# Altium PCB M66.PcbDoc
Units mm, origin at the board's own origin, x right, y up, seen from the top; angles counter-clockwise.
Board outline 25.78 x 41.4 mm, 2 copper layers (Top Layer, Bottom Layer); 26 components, 32 nets, 134 pads, 32 vias.
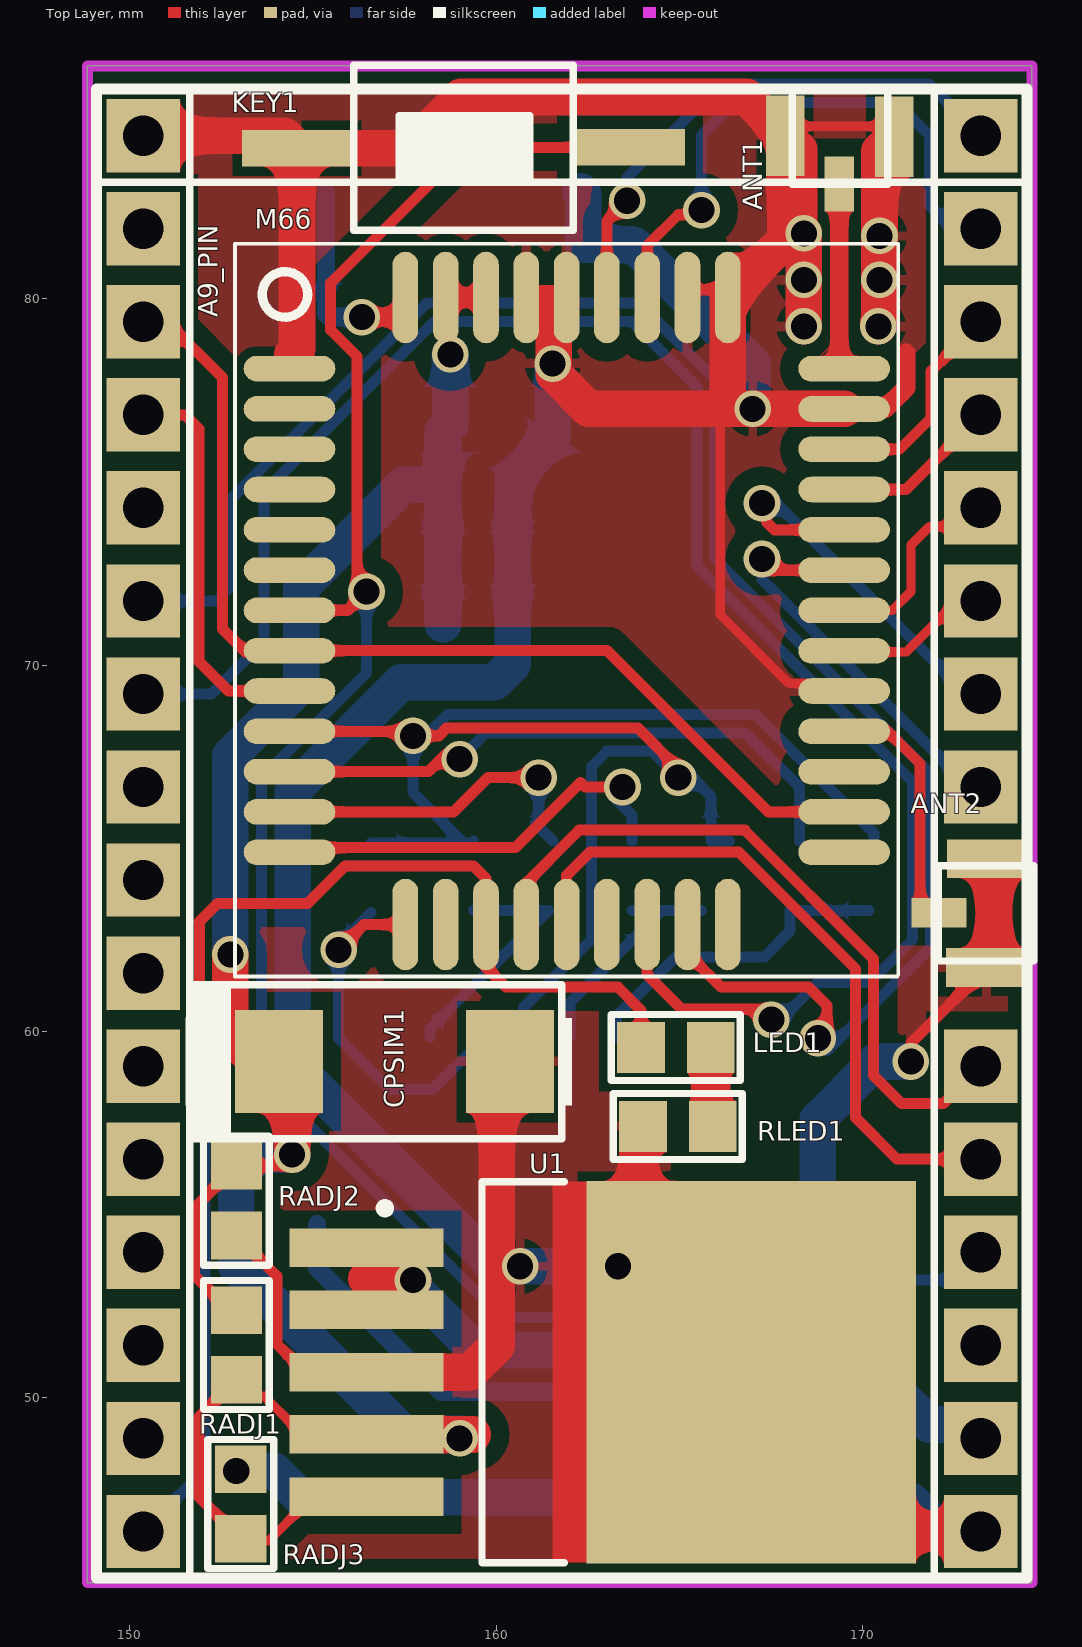
[diagram p0: Top Layer view]
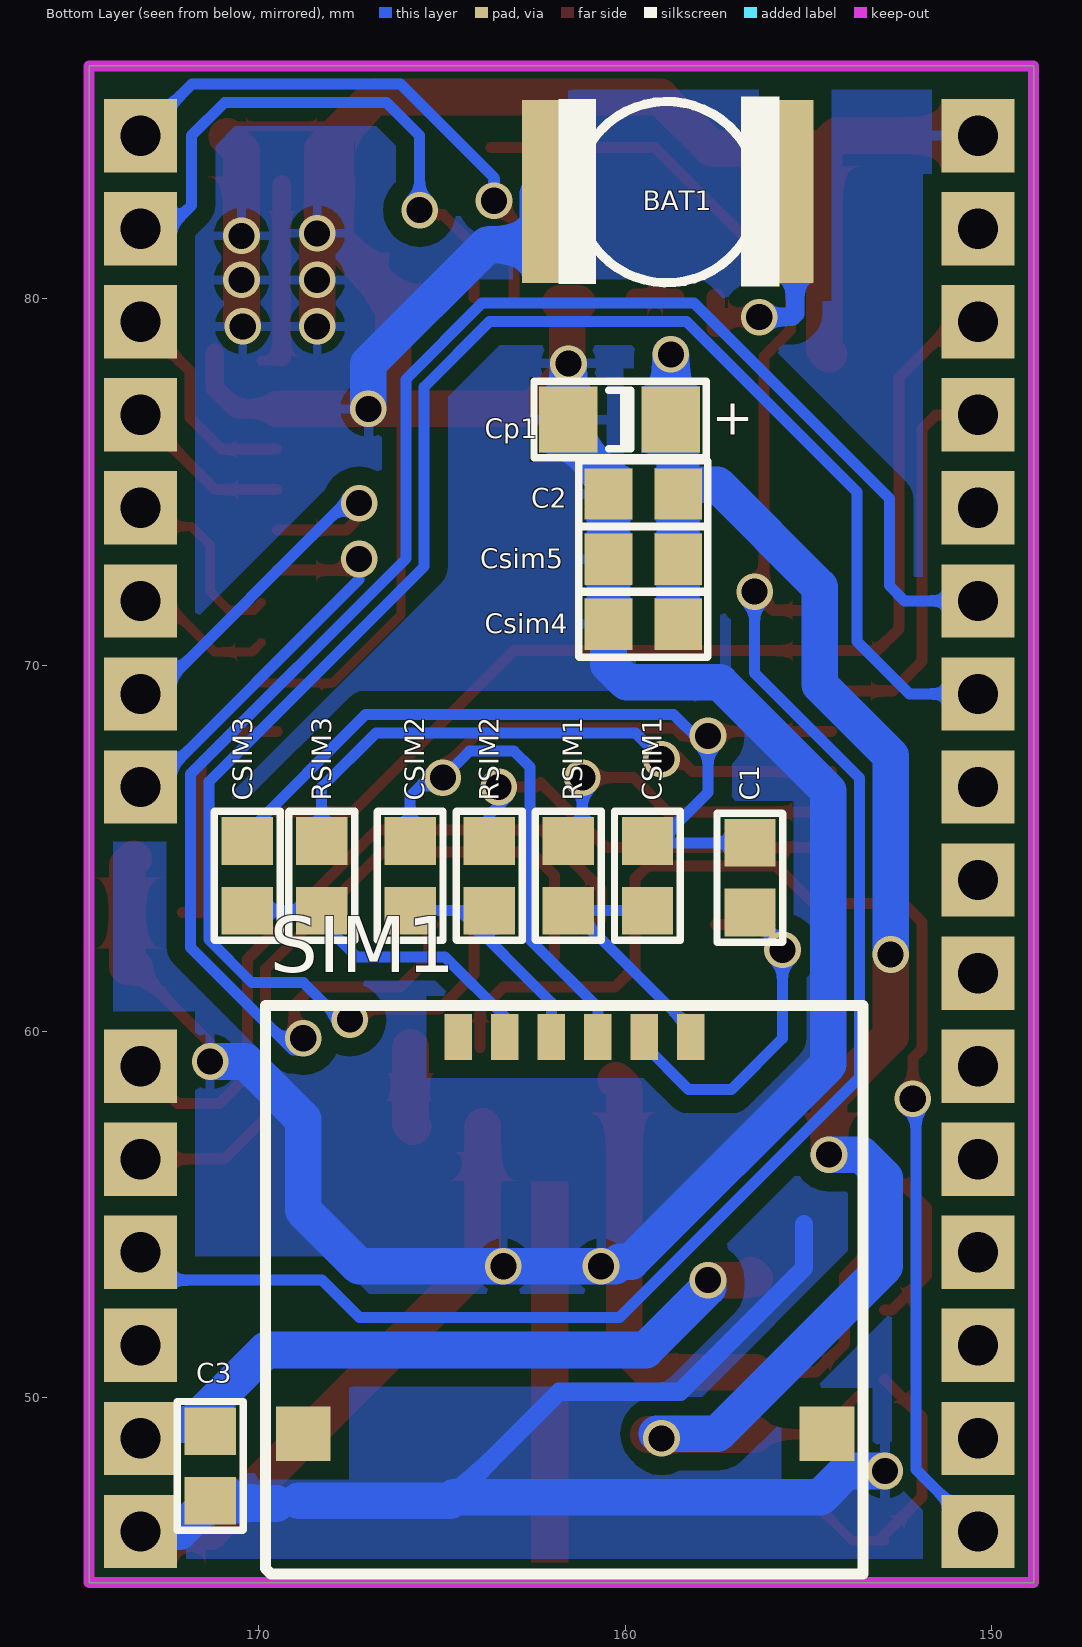
[diagram p1: Bottom Layer view, seen from below]

## Layer stack, top to bottom
Top Solder: solder mask 0.0102, Solder Resist, Dk 3.5
Top Layer: signal copper 0.0356
Dielectric 1: dielectric 0.32, FR-4, Dk 4.8
Bottom Layer: signal copper 0.0356
Bottom Solder: solder mask 0.0102, Solder Resist, Dk 3.5

## Board outline
148.844,44.958 148.844,86.36 174.625,86.36 174.625,44.958

## Design rules (kind name [scope] priority, off if disabled: settings)
Clearance [All] p1: gap=0.2 ignorepadtopadclearanceinfootprint=FALSE except(0.5: Arc-Poly Track-Poly SMDPad-Poly THPad-Poly Via-Poly Fill-Poly Poly-Poly)
ComponentClearance [All] p1: gap=0.01 collisioncheckmode=3 verticalgap=0.01 showdistances=FALSE
PolygonConnect [All] p1: connectstyle=Relief reliefconductorwidth=0.254 reliefentries=4 polygonreliefangle="90 Angle" airgapwidth=0.254
RoutingVias [All] p1: holewidth=0.711 width=1.27 viastyle="Through Hole" minholewidth=0.711 minwidth=1.27 maxholewidth=0.711 maxwidth=1.27
SolderMaskExpansion [All] p1: expansion=0.102
Width [All] p1: maxlimit=10 minlimit=0.254 preferedwidth=0.254 minimp=50.000000 maximp=50.000000 favimp=50.000000
29 further rules are at their usual default settings.

## Components (designator, comment, footprint, x,y, rotation, side; value= is the part's Value field where it differs from the comment)
A9_PIN "A9_module" A9_MODULE 150.368,69.19 r0 top locked
ANT1 "ANT_UFL" UFL_CON 169.291,84.582 r180 top
ANT2 "ANT_UFL" UFL_CON 173.533,63.322 r90 top
BAT1 "CAP_BATTERY" CAP_BAT 155.356,82.931 r270 bottom
C1 "100nf,50v" 0805. 156.595,64.19 r90 bottom
C2 "100nf,50v" 0805. 159.512,74.676 r180 bottom
C3 "100nf,50v" 0805. 171.323,48.133 r90 bottom
Cp1 "10uF" C1206. 160.147,76.708 r0 bottom
CPSIM1 "470uf,6.3V" MY_SMC_D 157.226,59.182 r0 top
CSIM1 "22PF,50v" 0805. 159.385,64.262 r270 bottom
CSIM2 "22PF,50v" 0805. 165.862,64.262 r270 bottom
CSIM3 "22PF,50v" 0805. 170.307,64.262 r270 bottom
Csim4 "33pf,50v" 0805. 159.512,71.12 r180 bottom
Csim5 "10pf,50v" 0805. 159.512,72.898 r180 bottom
KEY1 "KEY" SMD_KEY 159.131,83.947 r180 top
LED1 "BLUE,0805-SMD" 0805. 164.918,59.559 r180 top
M66 "M66_quectel" M66_QUECTEL 161.925,71.501 r0 top locked
RADJ1 "120k" 0805. 152.908,51.435 r90 top value=1K
RADJ2 "470R" 0805. 152.908,55.372 r90 top value=1K
RADJ3 "51k" 0805. 153.035,47.117 r270 top value=1K
RLED1 "470R,10%,0.1w" 0805. 164.973,57.404 r180 top
RSIM1 "47R,10%,0.1w" 0805. 161.544,64.262 r270 bottom value=50R
RSIM2 "47R,10%,0.1w" 0805. 163.703,64.262 r270 bottom value=50R
RSIM3 "47R,10%,0.1w" 0805. 168.275,64.262 r270 bottom value=50R
SIM1 "simcard" SIMCARD_M 158.203,59.852 r0 bottom locked
U1 "MIC29302" MIC29302 162.332,50.976 r180 top locked

## Footprints (in the part's own frame and the unit in brackets; to place one, negate y for a bottom-side part, rotate by r counter-clockwise, add the part's x,y. Pads: shape width x height; smd on the part's side, far side on the other; paste and mask are expansions set on the pad)
0805. [mm]
  rect 1.3x1.4 smd: 1(-0.939,-0.004) 2(0.961,-0.004)
  silkscreen extent -1.75,-0.9 1.77,0.9
A9_MODULE [mm]
  rect 2x2 hole 1.1: 1(0,15.265) 2(0,12.725) 3(0,10.185) 4(0,7.645) 5(0,5.105) 6(0,2.565) 7(0,0.025) 8(0,-2.515) 9(0,-5.055) 10(0,-7.595) 11(0,-10.135) 12(0,-12.675) 13(0,-15.215) 14(0,-17.755) 15(0,-20.295) 16(0,-22.835) 17(22.86,-22.835) 18(22.86,-20.295) 19(22.86,-17.755) 20(22.86,-15.215) 21(22.86,-12.675) 22(22.86,-10.135) 23(22.86,-2.515) 24(22.86,0.025) 25(22.86,2.565) 26(22.86,5.105) 27(22.86,7.645) 28(22.86,10.185) 29(22.86,12.725) 30(22.86,15.265)
  silkscreen extent -1.27,-24.1 24.13,16.54
C1206. [mm]
  rect 1.6x1.8 smd: 1(-1.4,0) 2(1.4,0)
  silkscreen extent -2.36,-1.04 2.34,1.04
CAP_BAT [mm]
  rect 5x1 smd: 1(0,0) 2(0,-6.95)
  silkscreen extent -2.59,-6.46 2.6,-0.43
M66_QUECTEL [mm]
  oval 2.5x0.7 smd: 1(-7.564,6.595) 2(-7.564,5.495) 3(-7.564,4.395) 4(-7.564,3.295) 5(-7.564,2.195) 6(-7.564,1.095) 7(-7.564,-0.005) 8(-7.564,-1.105) 9(-7.564,-2.205) 10(-7.564,-3.305) 11(-7.564,-4.405) 12(-7.564,-5.505) 13(-7.564,-6.605) 23(7.574,-6.606) 24(7.574,-5.506) 25(7.574,-4.406) 26(7.574,-3.306) 27(7.574,-2.206) 28(7.574,-1.106) 29(7.574,-0.006) 30(7.574,1.094) 31(7.574,2.194) 32(7.574,3.294) 33(7.574,4.394) 34(7.574,5.494) 35(7.574,6.594)
  oval 0.7x2.5 smd: 14(-4.4,-8.58) 15(-3.3,-8.58) 16(-2.2,-8.58) 17(-1.1,-8.58) 18(0,-8.58) 19(1.1,-8.58) 20(2.2,-8.58) 21(3.3,-8.58) 22(4.4,-8.58) 36(4.4,8.534) 37(3.3,8.534) 38(2.2,8.534) 39(1.1,8.534) 40(0,8.534) 41(-1.1,8.534) 42(-2.2,8.534) 43(-3.3,8.534) 44(-4.4,8.534)
  silkscreen extent -9.05,-10 9.05,10
MIC29302 [mm]
  rect 4.2x1.05 smd: 1(5.868,-3.126) 2(5.868,-1.426) 3(5.868,0.274) 4(5.868,1.974) 5(5.868,3.674)
  rect 9x10.45 smd: 6(-4.632,0.274)
  silkscreen extent 0.47,-4.93 5.49,5.47, body extent -8.25,-4.82 6.98,5.48, height 4.5
MY_SMC_D [mm]
  rect 2.4x2.8 smd: +(-3.15,0) -(3.15,0)
  silkscreen extent -5.71,-2.11 4.85,2.1, body extent -3.65,-2.15 3.65,2.15, height 2.83
SIMCARD_M [mm]
  rect 0.75x1.25 smd: 1(1.27,0) 2(0,0) 3(3.81,0) 4(2.54,0) 5(6.35,0) 6(5.08,0)
  rect 1.5x1.5 smd: 7(-3.72,10.83) 7(10.58,10.83)
  silkscreen extent -4.7,-0.86 11.61,14.66
SMD_KEY [mm]
  rect 3x1 smd: 1(-4.529,-0.191) 2(4.564,-0.165)
  silkscreen extent -2.98,-2.43 3.02,2.07
UFL_CON [mil]
  rect 41.5x86.61 smd: 1(-62,6) 1(55,5)
  rect 31.5x59.05 smd: 2(-3,57)
  silkscreen extent -55,-45 47,57

## Part data
C1 C2 C3 CSIM1 CSIM2 CSIM3 Csim4 Csim5: library part Cap, "Capacitor", LatestRevisionDate=17-Jul-2002, LatestRevisionNote="Re-released for DXP Platform.", PackageReference=RAD-0.3, Published=8-Jun-2000, Publisher="Altium Limited"
Cp1: library part "Cap Pol1", "Polarized Capacitor (Radial)", Published=8-Jun-2000, Publisher="Altium Limited", Revision="July-2002: Re-released for DXP Platform."
CPSIM1: library part "Cap Pol", "Polar capacitor", ASiD Part Number=C-AS, Volte=35v
LED1: library part LED0, "Typical INFRARED GaAs LED", LatestRevisionDate=08-Jul-2005, LatestRevisionNote="Mech Layer 1 removed.", PackageReference=LED-0, Published=8-Jun-2000, Publisher="Altium Limited"
RADJ1 RADJ2 RADJ3: library part Res1, "Resistor", Published=8-Jun-2000, Publisher="Altium Limited", Revision="July-2002: Re-released for DXP Platform."
RLED1 RSIM1 RSIM2 RSIM3: library part Res2, "Resistor", LatestRevisionDate=17-Jul-2002, LatestRevisionNote="Re-released for DXP Platform.", PackageReference=AXIAL-0.4, Published=8-Jun-2000, Publisher="Altium Limited"
  RSIM1 RSIM2 RSIM3: PackageDescription="Axial Device, Thru-Hole; 2 Leads; 0.4 in Pin Spacing"

## Via types
v1: diameter 1, hole 0.711, Top Layer to Bottom Layer, 32 vias

## Nets (pads, with @x,y where several pads share a name; then routed paths per layer and width w, separated by ;. In a path a pad name is that pad's centre, name@x,y a point inside that pad or via, vN(x,y) a via of type N, cw(c..) or ccw(c..) an arc to the next point about the centre after c; other vN are vias at no path point)
4V: C2.2 Cp1.1 CPSIM1.+ Csim4.2 Csim5.2 M66.42 M66.43 RADJ1.2 RADJ2.2 U1.4 | length 55.7
  Top Layer w0.254: 153.665,50.043 154.706,49.002 U1.4
  Top Layer w0.3: RADJ1.2 152.709,52.396 151.765,53.34 151.765,55.186 RADJ2.2 154.123,56.333 v1(154.432,56.642)
  Top Layer w0.5: M66.43 M66.42
  Top Layer w1: v1(152.748,62.103) 152.748,59.875 154.432,58.191 v1(154.432,56.642) ; U1.4 v1@159.365,49.002
  Bottom Layer w1: v1(152.748,62.103) 152.748,67.531 154.686,69.469 154.686,72.136 157.48,74.93 158.369,74.93 C2.2@158.551,74.748 ; v1(154.432,56.642) 153.543,56.642 152.908,56.007 152.908,53.594 157.48,49.022 v1@159.131,49.022 ; Csim4.2 Csim5.2 C2.2 C2.2@158.551,74.748 ; v1(158.75,78.486) 158.75,76.581 158.551,76.382 C2.2@158.551,74.748
  other v1: 159.004,48.895
ADC1: A9_PIN.4 M66.9 | length 10.8
  Top Layer w0.3: A9_PIN.4 151.511,76.835 151.892,76.454 151.892,70.104 152.7,69.296 M66.9
ANT_MAIN: ANT1.2 M66.35 | length 5.3
  Top Layer w0.254: M66.35@169.367,78.41 169.463,78.314 M66.35@169.926,78.314
  Top Layer w0.5: M66.35@169.367,78.41 ANT1.2
BT_MAIN: ANT2.2 M66.26 | length 7
  Top Layer w0.3: M66.26 170.692,68.195 171.577,67.31 171.577,63.246 ANT2.2
DBG_RXD: A9_PIN.29 M66.38 | length 15.9
  Top Layer w0.3: M66.38 164.125,81.448 164.973,82.296 165.481,82.296 v1(165.608,82.423)
  Bottom Layer w0.3: v1(165.608,82.423) 165.608,84.455 166.513,85.36 170.926,85.36 171.831,84.455 171.831,82.55 172.466,81.915 A9_PIN.29
DBG_TXD: A9_PIN.30 M66.39 | length 14.8
  Top Layer w0.3: M66.39 163.025,82.126 v1(163.576,82.677)
  Bottom Layer w0.3: v1(163.576,82.677) 163.576,83.312 166.124,85.86 171.823,85.86 A9_PIN.30
GND: A9_PIN.1 A9_PIN.17 ANT1.1 ANT2.1 BAT1.2 C2.1 C3.1 Cp1.2 CPSIM1.- Csim4.1 Csim5.1 KEY1.2 M66.1 M66.27 M66.34 M66.36 M66.37 M66.40 M66.41 RADJ2.1 RADJ3.1 RLED1.2 U1.3 U1.6 | length 200.7
  Top Layer w0.254: M66.37@165.354,80.254 M66.36@166.544,80.254 ; 166.268,76.995 166.116,76.843 166.116,71.374 167.976,69.514 M66.27@169.926,69.514 ; ANT1.1@167.894,84.455 167.894,84.709 170.586,84.709 ANT1.1@170.866,84.43
  Top Layer w0.3: RADJ2.1 154.014,53.331 154.014,51.472 154.784,50.702 U1.3 ; v1(171.323,59.182) 171.323,59.69 ANT2.1@173.38,61.747
  Top Layer w0.5: M66.34 170.627,76.995 171.199,77.567 171.199,78.521 171.196,78.525
  Top Layer w1: A9_PIN.1 154.224,84.455 KEY1.2 ; 154.432,78.486 154.567,78.621 KEY1.2 ; U1.3 159.292,50.702 160.02,51.43 160.02,58.445 CPSIM1.-@160.249,58.674 ; 161.29,79.883 161.773,79.883 161.577,79.687 161.577,77.945 162.527,76.995 166.116,76.995 ; RLED1.2@163.885,57.408 163.885,53.781 U1.6 171.311,46.355 A9_PIN.17 ; 167.894,81.604 166.544,80.254 M66.36 166.325,77.204 166.116,76.995 ; 167.894,81.788 ANT1.1@167.894,84.455 ; v1(168.402,79.248) v1(168.402,80.518) v1(168.402,81.788) 168.267,81.923 168.267,84.082 ANT1.1@167.894,84.455 ; M66.34 v1(167.005,76.995) 166.268,76.995 166.116,76.995 ; v1(170.434,79.248) 170.434,79.375 170.467,79.408 v1(170.467,80.518) v1(170.467,81.72) 170.467,84.031 ANT1.1@170.866,84.43 ; ANT2.1@173.38,61.747 173.406,61.773 173.589,61.773 173.589,64.536 ANT2.1@173.406,64.719 ; KEY1.2 157.645,84.112 159.043,85.51 166.839,85.51 ANT1.1@167.894,84.455
  Bottom Layer w0.3: v1@171.196,59.182 v1(171.323,59.182)
  Bottom Layer w0.5: 155.114,54.737 155.114,53.547 158.496,50.165 161.798,50.165 164.679,47.284
  Bottom Layer w1: v1(152.908,48.006) 153.949,48.006 154.672,47.284 164.679,47.284 164.769,47.194 168.906,47.194 ; v1(161.544,78.232) 161.547,78.229 Cp1.2 161.547,76.203 160.451,75.107 C2.1 Csim5.1 Csim4.1 160.451,70.026 159.955,69.53 157.409,69.53 154.448,66.569 154.448,59.107 159.834,53.721 160.147,53.721 160.274,53.594 v1(160.655,53.594) v1(163.322,53.594) 167.259,53.594 168.783,55.118 168.783,57.602 170.363,59.182 v1@171.196,59.182 ; BAT1.2 162.376,82.861 162.376,81.477 163.76,81.477 167.005,78.232 v1(167.005,76.995) ; 169.52,47.117 171.242,47.117 C3.1 172.158,46.355 A9_PIN.17
GPIO1: A9_PIN.28 M66.33 | length 5.9
  Top Layer w0.3: M66.33 171.018,75.895 171.878,76.755 171.878,78.025 A9_PIN.28
GPIO2: A9_PIN.27 M66.32 | length 4.6
  Top Layer w0.3: M66.32 171.188,74.795 A9_PIN.27
GPIO3: A9_PIN.24 M66.31 | length 10.8
  Top Layer w0.3: v1@167.386,74.422 167.386,73.914 167.605,73.695 M66.31
  Bottom Layer w0.3: v1(167.259,74.422) 167.64,74.422 172.847,69.215 A9_PIN.24
GPIO4: A9_PIN.23 M66.30 | length 11.2
  Top Layer w0.3: v1(167.259,72.898) 167.562,72.595 M66.30
  Bottom Layer w0.3: v1(167.259,72.898) 167.259,72.335 172.919,66.675 A9_PIN.23
I2C_SCL: A9_PIN.7 M66.20 | length 50.3
  Top Layer w0.3: M66.20 164.125,61.554 165.066,60.613 167.513,60.613 167.513,60.452 167.64,60.325 v1(167.513,60.325)
  Bottom Layer w0.3: A9_PIN.7 152.235,69.215 153.67,70.65 153.67,74.731 158.322,79.383 163.695,79.383 165.481,77.597 165.481,72.699 171.361,66.819 171.361,62.506 170.188,61.333 168.775,61.333 v1@167.64,60.198
I2C_SDA: A9_PIN.6 M66.21 | length 49.8
  Top Layer w0.3: A9_PIN.6 A9_PIN.6@150.622,71.755 ; M66.21 165.354,62.792 165.354,62.002 166.142,61.214 168.529,61.214 169.037,60.706 v1@169.037,59.817
  Bottom Layer w0.3: A9_PIN.6 152.367,71.755 152.781,72.169 152.781,74.549 158.115,79.883 163.902,79.883 165.981,77.804 165.981,72.906 171.861,67.026 171.861,62.299 169.062,59.499 v1@168.719,59.499
  other v1: 168.783,59.817
NET: A9_PIN.16 LED1.2 M66.16 | length 34.2
  Top Layer w0.3: v1(152.146,58.166) 152.146,59.275 151.898,59.523 151.898,62.986 151.892,62.992 152.4,63.5 154.855,63.5 155.876,64.521 159.38,64.521 159.725,64.176 M66.16 159.725,61.763 160.274,61.214 163.322,61.214 163.957,60.579 LED1.2
  Bottom Layer w0.3: A9_PIN.16 152.058,48.045 152.058,58.078 v1(152.146,58.166)
NetBAT1_1: BAT1.1 M66.44 | length 6.5
  Top Layer w0.5: v1(156.337,79.502) 157.226,79.502 157.525,79.203 M66.44
  Bottom Layer w0.5: BAT1.1 155.356,79.594 155.448,79.502 v1(156.337,79.502)
NetCSIM1_2: CSIM1.2 RSIM1.2 SIM1.2 | length 6.8
  Bottom Layer w0.3: SIM1.2 158.203,60.077 161.427,63.301 CSIM1.2
NetCSIM2_2: CSIM2.2 RSIM2.2 SIM1.3 | length 6.4
  Bottom Layer w0.3: SIM1.3 162.013,60.794 164.52,63.301 ; RSIM2.2 164.52,63.301 ; CSIM2.2@165.612,63.301 164.52,63.301
NetCSIM3_2: CSIM3.2 RSIM3.2 SIM1.6 | length 9
  Bottom Layer w0.3: SIM1.6 163.283,60.413 164.909,62.039 167.322,62.039 168.025,62.742 168.025,63.301 CSIM3.2@170.184,63.301
NetLED1_1: LED1.1 RLED1.1 | length 2.2
  Top Layer w1: RLED1.1@165.785,57.408 165.857,57.48 LED1.1
NetRADJ1_1: RADJ1.1 RADJ3.2 U1.5 | length 9.3
  Top Layer w0.254: RADJ3.2@152.908,46.101 153.797,46.101 154.998,47.302 U1.5
  Top Layer w0.3: RADJ1.1 151.892,49.476 151.892,47.295 RADJ3.2
PWR_K: A9_PIN.20 KEY1.1 M66.7 | length 58.6
  Top Layer w0.3: M66.7 155.951,71.496 156.21,71.755 156.21,78.427 155.487,79.15 155.487,80.43 159.195,84.138 KEY1.1
  Bottom Layer w0.3: v1(156.464,72.009) 156.464,69.787 153.598,66.921 153.598,58.746 160.154,52.19 167.252,52.19 168.275,53.213 172.429,53.213 172.429,53.975 A9_PIN.20
RXD: A9_PIN.21 M66.18 | length 19.6
  Top Layer w0.3: M66.18@161.925,62.055 M66.18 161.925,64.262 162.56,64.897 166.624,64.897 169.807,61.714 169.807,57.65 170.942,56.515 A9_PIN.21
RXD_AUX: A9_PIN.25 M66.28 | length 4.5
  Top Layer w0.254: M66.28@169.926,70.614 170.182,70.358 171.196,70.358 172.72,71.882 A9_PIN.25@173.736,71.882
SIM_GND: C1.2 CSIM1.1 CSIM2.1 CSIM3.1 M66.10 SIM1.4 | length 46.1
  Top Layer w0.3: M66.10 157.61,68.196 v1(157.734,68.072) 158.437,68.072 158.652,68.287 163.869,68.287 164.973,67.183 v1(164.973,66.929)
  Bottom Layer w0.3: C1.2 CSIM1.1@159.004,65.151 ; CSIM1.1 159.339,65.151 CSIM1.1@159.004,65.151 ; SIM1.4 160.743,60.651 162.598,62.506 162.598,67.221 163.029,67.652 164.25,67.652 v1(164.973,66.929) 165.354,66.929 165.866,66.417 CSIM2.1 CSIM2.1@166.377,65.201 ; CSIM3.1 170.311,65.422 167.081,68.652 158.674,68.652 157.988,67.966 157.882,68.072 v1(157.734,68.072) 157.734,66.521 159.054,65.201 CSIM1.1@159.004,65.151
SIMCLK: M66.13 RSIM2.1 | length 11.7
  Top Layer w0.3: M66.13 154.486,65.021 160.525,65.021 162.306,66.802 162.433,66.675 v1(163.449,66.675)
  Bottom Layer w0.3: v1(163.449,66.675) 163.195,66.421 163.707,65.909 RSIM2.1
SIMDATA: M66.11 RSIM3.1 | length 16.1
  Top Layer w0.3: M66.11 158.155,67.096 v1@158.623,67.564
  Bottom Layer w0.3: v1(159.004,67.437) 159.719,68.152 166.798,68.152 168.279,66.671 RSIM3.1
SIMRST: M66.12 RSIM1.1 | length 9.2
  Top Layer w0.3: M66.12 158.841,65.996 159.774,66.929 v1(161.163,66.929)
  Bottom Layer w0.3: v1(161.163,66.929) 161.163,65.786 161.063,65.686 RSIM1.1
SIMVCC: C1.1 M66.14 SIM1.1 | length 11
  Top Layer w0.3: v1(155.702,62.23) 156.393,62.921 M66.14
  Bottom Layer w0.3: C1.1 155.702,62.362 v1(155.702,62.23) 155.702,59.817 157.099,58.42 158.266,58.42 159.473,59.627 SIM1.1
TXD: A9_PIN.22 M66.17 | length 19.6
  Top Layer w0.3: M66.17 160.655,63.091 160.655,63.881 162.269,65.495 166.788,65.495 170.307,61.976 170.307,58.801 171.069,58.039 172.212,58.039 A9_PIN.22
TXD_AUX: A9_PIN.26 M66.29 | length 5.9
  Top Layer w0.254: M66.29@169.926,71.714 170.139,71.501 170.815,71.501 171.323,72.009 171.323,73.279 171.831,73.787 173.101,73.787 A9_PIN.26@173.736,74.422
VBAT: A9_PIN.18 C3.2 U1.1 U1.2 | length 18.8
  Top Layer w1: 156.464,53.252 156.552,53.34 156.679,53.213 v1(157.734,53.213)
  Bottom Layer w1: v1(157.734,53.213) 157.734,53.013 159.439,51.308 169.798,51.308 171.83,49.276 172.847,49.276 A9_PIN.18
VO: A9_PIN.3 M66.8 M66.24 | length 28.7
  Top Layer w0.3: A9_PIN.3 151.003,79.375 152.527,77.851 152.527,70.993 153.124,70.396 M66.8 163.03,70.396 167.431,65.995 M66.24
pads on no net: A9_PIN.2 A9_PIN.5 A9_PIN.8 A9_PIN.9 A9_PIN.10 A9_PIN.11 A9_PIN.12 A9_PIN.13 A9_PIN.14 A9_PIN.15 A9_PIN.19 M66.2 M66.3 M66.4 M66.5 M66.6 M66.15 M66.19 M66.22 M66.23 M66.25 SIM1.5 SIM1.7

## Polygon pours and split planes (outlines as drawn)
no net on Bottom Overlay (solid, remove dead copper): 148.844,44.958
GND on Top Layer "Top Layer-GND" (solid, remove dead copper, pour order 12): 174.625,86.36 174.498,86.233 148.844,86.233 148.844,44.958 148.971,45.085 174.625,45.085
GND on Top Layer "Top Layer-GND 1" (solid, remove dead copper, pour order 10): 168.783,78.359 169.037,78.613 169.291,78.867
GND on Bottom Layer "Bottom Layer-GND" (solid, remove dead copper, pour order 14): 174.577,86.337 148.796,86.337 148.796,44.935 174.577,44.935

## Keep-outs
Keep-Out Layer:
  the board outline again, w0.3

## Other copper
Top Layer:
  rectangle net GND: 161.544,45.502 162.56,55.902

## Text inside footprints (layer, text, board x,y; h text height)
Cp1: Bottom Overlay "+" at 156.489,77.14 h1 r180